# Altium PCB Terminal_Board_PCB.PcbDoc
Units mm, origin at the board's own origin, x right, y up, seen from the top; angles counter-clockwise.
Board outline 240.8 x 116.8 mm, 2 copper layers (Top Layer, Bottom Layer 1), stack 0.426 mm thick; 17 components, 37 nets, 96 pads, 40 vias.
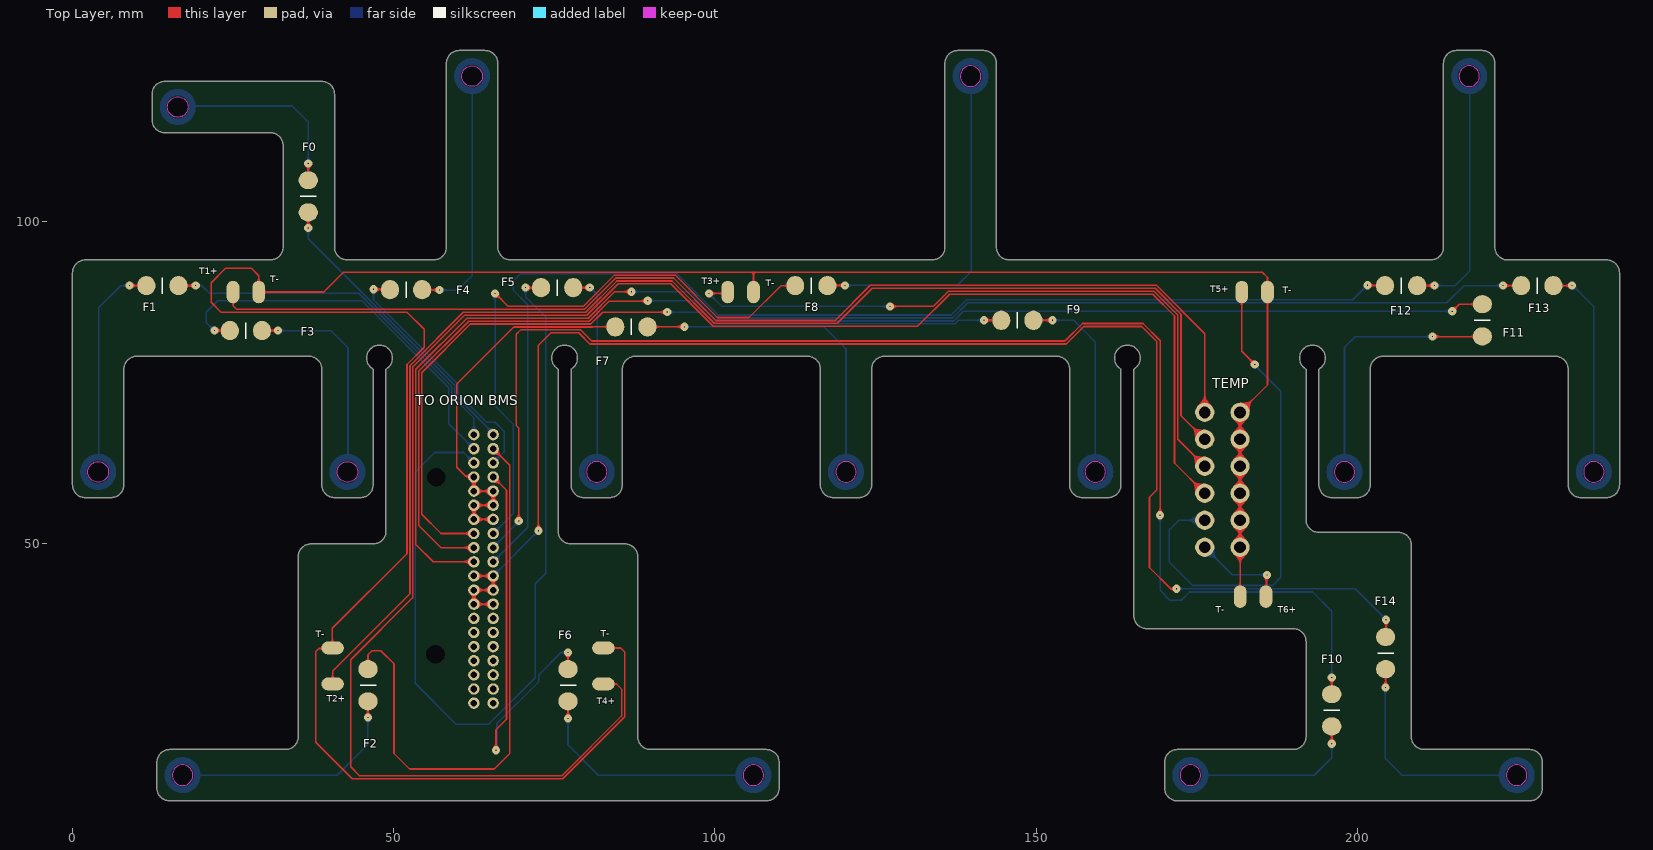
[diagram p0: Top Layer view]
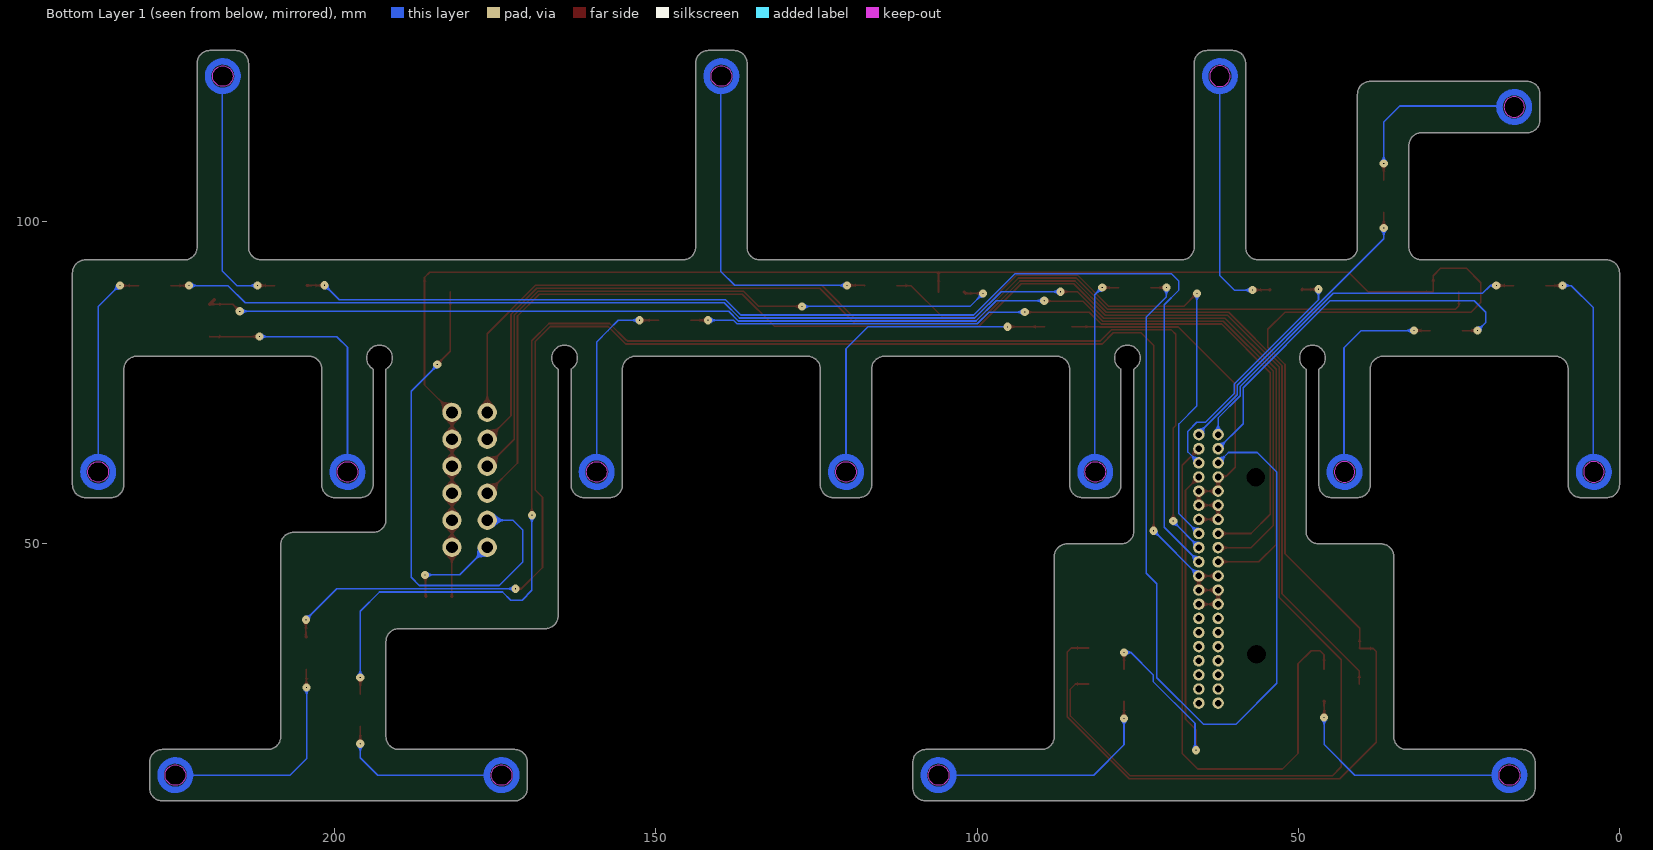
[diagram p1: Bottom Layer 1 view, seen from below]
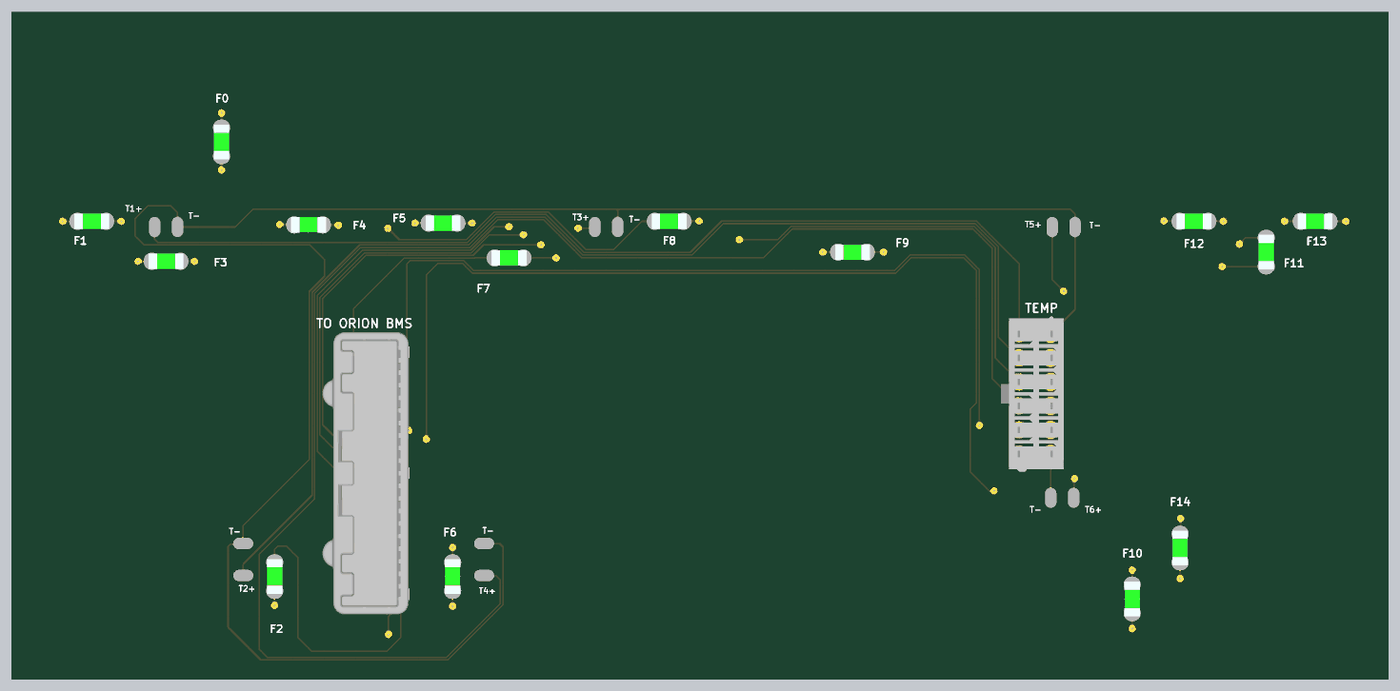
[diagram p2: 3D render of the assembled board from above, using the file's embedded part models]

## Layer stack, top to bottom
Top Solder: solder mask 0.0102, Solder Resist, Dk 3.5
Top Solder: solder mask 0.0102, Solder Resist, Dk 3.5
Stiffener 1: core 0.2032, Core-024, Dk 4.6
Top Layer: signal copper 0.035
Dielectric 1: core 0.1524, Core-020, Dk 4.1
Bottom Layer 1: signal copper 0.035
Bottom Solder: solder mask 0.0102, Solder Resist, Dk 3.5
Bottom Solder: solder mask 0.0102, Solder Resist, Dk 3.5

## Board outline
0.013,59.093 ccw(c2.013,59.093) 2.013,57.093 6.013,57.093 ccw(c6.013,59.093) 7.427,57.679 ccw(c6.013,59.093) 8.013,59.093 8.013,77.093 cw(c10.013,77.093) 10.013,79.093 36.813,79.093 cw(c36.813,77.093) 38.813,77.093 38.813,59.093 ccw(c40.813,59.093) 39.398,57.679 ccw(c40.813,59.093) 40.813,57.093 44.813,57.093 ccw(c44.813,59.093) 46.813,59.093 46.813,77.093 cw(c47.813,78.825) 48.813,77.093 48.813,64.493 48.813,51.893 cw(c46.813,51.893) 46.813,49.893 37.154,49.893 ccw(c37.154,47.893) 35.154,47.893 35.154,19.893 cw(c33.154,19.893) 34.568,18.479 cw(c33.154,19.893) 33.154,17.893 15.154,17.893 ccw(c15.154,15.893) 13.154,15.893 13.154,11.893 ccw(c15.154,11.893) 15.154,9.893 108.003,9.893 ccw(c108.003,11.893) 110.003,11.893 110.003,15.893 ccw(c108.003,15.893) 108.003,17.893 90.003,17.893 cw(c90.003,19.893) 88.003,19.893 88.003,47.893 ccw(c86.003,47.893) 86.003,49.893 77.613,49.893 cw(c77.613,51.893) 75.613,51.893 75.613,64.493 75.613,77.093 cw(c76.613,78.825) 77.613,77.093 77.613,59.093 ccw(c79.613,59.093) 79.613,57.093 83.613,57.093 ccw(c83.613,59.093) 85.027,57.679 ccw(c83.613,59.093) 85.613,59.093 85.613,77.093 cw(c87.613,77.093) 87.613,79.093 114.413,79.093 cw(c114.413,77.093) 116.413,77.093 116.413,59.093 ccw(c118.413,59.093) 116.998,57.679 ccw(c118.413,59.093) 118.413,57.093 122.413,57.093 ccw(c122.413,59.093) 124.413,59.093 124.413,77.093 cw(c126.413,77.093) 126.413,79.093 153.213,79.093 cw(c153.213,77.093) 155.213,77.093 155.213,59.093 ccw(c157.213,59.093) 157.213,57.093 161.213,57.093 ccw(c161.213,59.093) 163.213,59.093 163.213,77.093 cw(c164.213,78.825) 165.213,77.093 165.213,38.693 ccw(c167.213,38.693) 167.213,36.693 190.013,36.693 cw(c190.013,34.693) 192.013,34.693 192.013,27.293 192.013,19.893 cw(c190.013,19.893) 191.427,18.479 cw(c190.013,19.893) 190.013,17.893 172.013,17.893 ccw(c172.013,15.893) 170.013,15.893 170.013,13.893 170.013,11.893 ccw(c172.013,11.893) 170.598,10.479 ccw(c172.013,11.893) 172.013,9.893 226.803,9.893 ccw(c226.803,11.893) 228.217,10.479 ccw(c226.803,11.893) 228.803,11.893 228.803,13.893 228.803,15.893 ccw(c226.803,15.893) 226.803,17.893 210.403,17.893 cw(c210.403,19.893) 208.403,19.893 208.403,49.693 ccw(c206.403,49.693) 207.817,51.108 ccw(c206.403,49.693) 206.403,51.693 194.013,51.693 cw(c194.013,53.693) 192.013,53.693 192.013,77.093 cw(c193.013,78.825) 194.013,77.093 194.013,59.093 ccw(c196.013,59.093) 194.598,57.679 ccw(c196.013,59.093) 196.013,57.093 200.013,57.093 ccw(c200.013,59.093) 202.013,59.093 202.013,77.093 cw(c204.013,77.093) 202.813,78.693 cw(c204.013,77.093) 204.013,79.093 230.813,79.093 cw(c230.813,77.093) 232.813,77.093 232.813,59.093 ccw(c234.813,59.093) 234.813,57.093 238.813,57.093 ccw(c238.813,59.093) 240.813,59.093 240.813,92.093 ccw(c238.813,92.093) 240.227,93.508 ccw(c238.813,92.093) 238.813,94.093 223.413,94.093 cw(c223.413,96.093) 221.413,96.093 221.413,124.693 ccw(c219.412,124.693) 221.145,125.693 ccw(c219.413,124.693) 219.413,126.693 217.413,126.693 215.413,126.693 ccw(c215.413,124.693) 213.413,124.693 213.413,96.093 cw(c211.413,96.093) 211.413,94.093 178.613,94.093 145.813,94.093 cw(c145.813,96.093) 143.813,96.093 143.813,124.693 ccw(c141.813,124.693) 143.227,126.108 ccw(c141.813,124.693) 141.813,126.693 139.813,126.693 137.813,126.693 ccw(c137.813,124.693) 135.813,124.693 135.813,96.093 cw(c133.813,96.093) 133.813,94.093 101.013,94.093 68.213,94.093 cw(c68.213,96.093) 66.213,96.093 66.213,124.693 ccw(c64.213,124.693) 65.627,126.108 ccw(c64.213,124.693) 64.213,126.693 62.213,126.693 60.213,126.693 ccw(c60.213,124.693) 58.798,126.108 ccw(c60.213,124.693) 58.213,124.693 58.213,96.093 cw(c56.213,96.093) 56.213,94.093 49.508,94.093 42.803,94.093 cw(c42.803,96.093) 40.803,96.093 40.803,119.893 ccw(c38.803,119.893) 38.803,121.893 14.403,121.893 ccw(c14.403,119.893) 12.403,119.893 12.403,115.893 ccw(c14.403,115.893) 14.403,113.893 30.803,113.893 cw(c30.803,111.893) 32.803,111.893 32.803,96.093 cw(c30.803,96.093) 30.803,94.093 2.013,94.093 ccw(c2.013,92.093) 0.013,92.093
cut-out: 4.013,59.493 cw(c4.013,61.093) 2.413,61.093 cw(c4.013,61.093) 4.013,62.693 cw(c4.013,61.093) 5.613,61.093 cw(c4.013,61.093)
cut-out: 42.813,59.493 cw(c42.813,61.093) 41.213,61.093 cw(c42.813,61.093) 42.813,62.693 cw(c42.813,61.093) 44.413,61.093 cw(c42.813,61.093)
cut-out: 15.554,13.893 ccw(c17.154,13.893) 17.154,12.293 ccw(c17.154,13.893) 18.754,13.893 ccw(c17.154,13.893) 17.154,15.493 ccw(c17.154,13.893)
cut-out: 104.403,13.893 ccw(c106.003,13.893) 106.003,12.293 ccw(c106.003,13.893) 107.603,13.893 ccw(c106.003,13.893) 106.003,15.493 ccw(c106.003,13.893)
cut-out: 80.013,61.093 ccw(c81.613,61.093) 81.613,59.493 ccw(c81.613,61.093) 83.213,61.093 ccw(c81.613,61.093) 81.613,62.693 ccw(c81.613,61.093)
cut-out: 118.813,61.093 ccw(c120.413,61.093) 120.413,59.493 ccw(c120.413,61.093) 122.013,61.093 ccw(c120.413,61.093) 120.413,62.693 ccw(c120.413,61.093)
cut-out: 157.613,61.093 ccw(c159.213,61.093) 159.213,59.493 ccw(c159.213,61.093) 160.813,61.093 ccw(c159.213,61.093) 159.213,62.693 ccw(c159.213,61.093)
cut-out: 172.413,13.893 ccw(c174.013,13.893) 174.013,12.293 ccw(c174.013,13.893) 175.613,13.893 ccw(c174.013,13.893) 174.013,15.493 ccw(c174.013,13.893)
cut-out: 223.203,13.893 ccw(c224.803,13.893) 224.803,12.293 ccw(c224.803,13.893) 226.403,13.893 ccw(c224.803,13.893) 224.803,15.493 ccw(c224.803,13.893)
cut-out: 196.413,61.093 ccw(c198.013,61.093) 198.013,59.493 ccw(c198.013,61.093) 199.613,61.093 ccw(c198.013,61.093) 198.013,62.693 ccw(c198.013,61.093)
cut-out: 235.213,61.093 ccw(c236.813,61.093) 236.813,59.493 ccw(c236.813,61.093) 238.413,61.093 ccw(c236.813,61.093) 236.813,62.693 ccw(c236.813,61.093)
cut-out: 215.813,122.693 ccw(c217.413,122.693) 217.413,121.093 ccw(c217.413,122.693) 219.013,122.693 ccw(c217.413,122.693) 217.413,124.293 ccw(c217.413,122.693)
cut-out: 138.213,122.693 ccw(c139.813,122.693) 139.813,121.093 ccw(c139.813,122.693) 141.413,122.693 ccw(c139.813,122.693) 139.813,124.293 ccw(c139.813,122.693)
cut-out: 62.213,121.093 cw(c62.213,122.693) 60.613,122.693 cw(c62.213,122.693) 62.213,124.293 cw(c62.213,122.693) 63.813,122.693 cw(c62.213,122.693)
cut-out: 16.403,116.293 cw(c16.403,117.893) 14.803,117.893 cw(c16.403,117.893) 16.403,119.493 cw(c16.403,117.893) 18.003,117.893 cw(c16.403,117.893)
board region "BMS Header Stiffener": 51.813,74.155 51.813,18.783 72.613,18.783 72.613,74.155
board region "Temp Board Stiffener": 170.213,43.675 187.013,43.675 187.013,76.822 170.213,76.822
board region "Layer Stack Region 1": 826 vertices, not listed, extent 0.013,9.893 240.813,126.693

## Design rules (kind name [scope] priority, off if disabled: settings)
Clearance [All] p1: gap=0.254 ignorepadtopadclearanceinfootprint=FALSE except(0: Arc-Hole Track-Hole SMDPad-Hole THPad-Hole Via-Hole Fill-Hole Poly-Hole Region-Hole Text-Hole; 0.1: THPad-THPad; 0.152: Arc-SMDPad Track-SMDPad SMDPad-SMDPad; 0.2: Arc-THPad Track-THPad SMDPad-THPad THPad-Via; 0.203: Arc-Arc Arc-Track Arc-Region Track-Track Track-Region SMDPad-Region THPad-Region Via-Region Fill-Region Poly-Region Region-Region; 0.6: Arc-Poly Track-Poly SMDPad-Poly THPad-Poly Via-Poly Fill-Poly Poly-Poly)
DiffPairsRouting [All] p1: maxlimit=0.254 minlimit=0.254 mostfreqgap=0.254 toplayer_minwidth=0.381 toplayer_maxwidth=0.381 toplayer_prefwidth=0.381 bottomlayer_minwidth=0.381 bottomlayer_maxwidth=0.381 bottomlayer_prefwidth=0.381 substack1={0A3D3CD8-3E21-4DB5-9F74-4A8A07FAF6CB} toplayer_{0a3d3cd8-3e21-4db5-9f74-4a8a07faf6cb}_minwidth=0.381 toplayer_{0a3d3cd8-3e21-4db5-9f74-4a8a07faf6cb}_maxwidth=0.381 toplayer_{0a3d3cd8-3e21-4db5-9f74-4a8a07faf6cb}_prefwidth=0.381 bottomlayer_{0a3d3cd8-3e21-4db5-9f74-4a8a07faf6cb}_minwidth=0.381 bottomlayer_{0a3d3cd8-3e21-4db5-9f74-4a8a07faf6cb}_maxwidth=0.381 bottomlayer_{0a3d3cd8-3e21-4db5-9f74-4a8a07faf6cb}_prefwidth=0.381 maxuncoupledlength=12.7
Height [All] p1: minheight=0 maxheight=50 prefheight=12.7
HoleSize [All] p1: absolutevalues=TRUE maxlimit=10 minlimit=0.025 maxpercent=80.000 minpercent=20.000
PlaneClearance [All] p1: clearance=0.4
PlaneConnect [All] p1: pad.planeconnectstyle=Relief pad.reliefexpansion=0.508 pad.reliefentries=4 pad.reliefconductorwidth=0.8 pad.reliefairgap=0.254 via.planeconnectstyle=Direct via.reliefexpansion=0.508 via.reliefentries=4 via.reliefconductorwidth=0.8 via.reliefairgap=0.254
PolygonConnect [All] p1: thpad.connectstyle=Relief thpad.reliefconductorwidth=0.6 thpad.reliefentries=4 thpad.polygonreliefangle="90 Angle" thpad.airgapwidth=0.254 smdpad.connectstyle=Relief smdpad.reliefconductorwidth=0.6 smdpad.reliefentries=4 smdpad.polygonreliefangle="90 Angle" smdpad.airgapwidth=0.254 via.connectstyle=Direct via.reliefconductorwidth=0.6 via.reliefentries=4 via.polygonreliefangle="90 Angle" via.airgapwidth=0.254
RoutingVias [All] p1: holewidth=0.711 width=1.27 viastyle="Through Hole" minholewidth=0.203 minwidth=0.254 maxholewidth=0.711 maxwidth=1.27
SolderMaskExpansion [All] p1: expansion=0.051 istentingtop=FALSE
Width [All] p1: maxlimit=3 minlimit=0.127 preferedwidth=0.5 substack1={0A3D3CD8-3E21-4DB5-9F74-4A8A07FAF6CB}
25 further rules are at their usual default settings.

## Components (designator, comment, footprint, x,y, rotation, side; value= is the part's Value field where it differs from the comment)
F0 "0451.750MRL" FUSC6127X269N#1 36.716,103.993 r270 top
F1 "0451.750MRL" FUSC6127X269N#1 14.013,90.093 r0 top
F2 "0451.750MRL" FUSC6127X269N#1 46.013,27.893 r90 top
F3 "0451.750MRL" FUSC6127X269N#1 27.013,83.093 r180 top
F4 "0451.750MRL" FUSC6127X269N#1 51.931,89.46 r180 top
F5 "0451.750MRL" FUSC6127X269N#1 75.451,89.776 r180 top
F6 "0451.750MRL" FUSC6127X269N#2 77.144,27.893 r90 top
F7 "0451.750MRL" FUSC6127X269N#1 87.008,83.68 r180 top
F8 "0451.750MRL" FUSC6127X269N#1 115.013,90.093 r180 top
F9 "0451.750MRL" FUSC6127X269N#1 147.079,84.696 r180 top
F10 "0451.750MRL" FUSC6127X269N#1 196.013,23.99 r90 top
F11 "0451.750MRL" FUSC6127X269N#1 219.469,84.696 r90 top
F12 "0451.750MRL" FUSC6127X269N#1 206.813,90.093 r180 top
F13 "0451.750MRL" FUSC6127X269N#1 228.013,90.093 r180 top
F14 "0451.750MRL" FUSC6127X269N#1 204.403,32.893 r90 top
TEMP "39293126" 39293126 181.75,70.372 r90 top
"TO ORION BMS" "1376113-6" 1376113-6 62.497,44.904 r270 top

## Footprints (in the part's own frame and the unit in brackets; to place one, negate y for a bottom-side part, rotate by r counter-clockwise, add the part's x,y. Pads: shape width x height; smd on the part's side, far side on the other; paste and mask are expansions set on the pad)
1376113-6 [mil]
  round 0 hole 114.49 unplated: 0(-605,-230) 0(480,-235)
  round 70 hole 40: 1(-866.14,118.11) 2(-866.14,0) 3(-779.53,118.11) 4(-779.53,0) 5(-692.91,118.11) 6(-692.91,0) 7(-606.3,118.11) 8(-606.3,0) 9(-519.69,118.11) 10(-519.69,0) 11(-433.07,118.11) 12(-433.07,0) 13(-346.46,118.11) 14(-346.46,0) 15(-259.84,118.11) 16(-259.84,0) 17(-173.23,118.11) 18(-173.23,0) 19(-86.61,118.11) 20(-86.61,0) 21(0,118.11) 22(0,0) 23(86.61,118.11) 24(86.61,0) 25(173.23,118.11) 26(173.23,0) 27(259.84,118.11) 28(259.84,0) 29(346.46,118.11) 30(346.46,0) 31(433.07,118.11) 32(433.07,0) 33(519.68,118.11) 34(519.68,0) 35(606.3,118.11) 36(606.3,0) 37(692.91,118.11) 38(692.91,0) 39(779.53,118.11) 40(779.53,0)
  body extent -1015,-321 930,281, height 940
39293126 [mm]
  round 3 hole 1.85: 1(0,0) 2(0,5.5) 3(-4.2,0) 4(-4.2,5.5) 5(-8.4,0) 6(-8.4,5.5) 7(-12.6,0) 8(-12.6,5.5) 9(-16.8,0) 10(-16.8,5.5) 11(-21,0) 12(-21,5.5)
  body extent -24.1,-2.3 3.1,8.7, height 2.99
FUSC6127X269N#1 [mm]
  rrect100% 2.8x3 smd: 1(-2.5,0) 2(2.5,0)
  silkscreen extent 0,-1.24 0,1.24, body extent -3.05,-1.35 3.05,1.35, height 2.69
FUSC6127X269N#2 [mm]
  rrect100% 2.8x3 smd paste+0: 1(-2.5,0)
  rrect100% 2.8x3 smd: 2(2.5,0)
  silkscreen extent 0,-1.24 0,1.24, body extent -3.05,-1.35 3.05,1.35, height 2.69

## Part data
F0 F1 F2 F3 F4 F5 F6 F7 F8 F9 F10 F11 F12 F13 F14: "Fuse", Manufacturer_Name=LITTELFUSE, Arrow Part Number=0451.750MRL, Arrow Price/Stock=https://www.arrow.com/en/products/0451.750mrl/littelfuse, Datasheet Link=http://www.farnell.com/datasheets/88908.pdf, Height=2.69mm, Manufacturer_Part_Number=0451.750MRL
TEMP: Digikey Part Number=WM3848-ND, Angle=0, Contact=Tin, Flange=No, Part Number=39293126, Pitch=4.2mm, Positions=12, Row Spacing=5.5mm
"TO ORION BMS": Digikey Part Number=1376113-6-ND, Angle=180, Contact=Gold, Digikey Link=https://www.digikey.com.au/products/en?keywords=1376113-6, Flange=na, Part Number=1376113-6, Pitch=3, Positions=40, Row Spacing=2.2

## Free pads (board coordinates)
  oval 2x3.5 smd: 2(25.013,89.093) 2(29.013,89.093) 2(102.013,89.093) 2(106.013,89.093) 2(181.769,41.693) 2(182.013,89.093) 2(185.769,41.693) 2(186.013,89.093)
  oval 3.5x2 smd: 2(40.513,28.093) 2(40.513,33.693) 2(82.644,28.093) 2(82.644,33.693)

## Via types
v1: diameter 1.27, hole 0, Top Layer to Bottom Layer 1, 40 vias

## Nets (pads, with @x,y where several pads share a name; then routed paths per layer and width w, separated by ;. In a path a pad name is that pad's centre, name@x,y a point inside that pad or via, vN(x,y) a via of type N, cw(c..) or ccw(c..) an arc to the next point about the centre after c; other vN are vias at no path point)
Tap0: "TO ORION BMS.1" F0.2 | length 46.5
  Top Layer w0.254: v1(36.716,99.047) F0.2
  Bottom Layer 1 w0.254: v1(36.716,99.047) 36.716,97.385 59.51,74.59 59.51,73.118 65.497,67.131 65.497,66.904
Tap1: "TO ORION BMS.2" F1.2 | length 58
  Top Layer w0.254: F1.2 v1(19.19,90.093)
  Bottom Layer 1 w0.254: v1(19.19,90.093) 20.143,90.093 21.349,88.887 44.567,88.887 59.053,74.401 59.053,72.929 62.497,69.485 62.497,66.904
Tap2: "TO ORION BMS.3" F2.2 | length 89.9
  Top Layer w0.254: F2.2 46.013,32.652 46.622,33.261 48.019,33.261 50.051,31.229 50.051,17.281 52.485,14.846 65.672,14.846 68.085,17.259 68.085,62.116 65.497,64.704
Tap3: "TO ORION BMS.4" F3.2 | length 61
  Top Layer w0.254: v1(22.111,83.093) F3.2
  Bottom Layer 1 w0.254: v1(22.111,83.093) 20.841,84.363 20.841,85.966 22.619,87.744 45.063,87.744 58.596,74.212 58.596,68.605 62.497,64.704
Tap4: "TO ORION BMS.5" F4.2 | length 39.5
  Top Layer w0.254: v1(46.876,89.524) 46.908,89.492 49.335,89.492 F4.2@49.367,89.524
  Top Layer w0.5: F4.2@49.367,89.524 F4.2
  Bottom Layer 1 w0.254: v1(46.876,89.524) 46.876,87.871 59.967,74.78 59.967,73.313 64.459,68.821 65.799,68.821 67.196,67.424 67.196,64.203 65.497,62.504
Tap5: "TO ORION BMS.6" F5.2 | length 133.6
  Top Layer w0.254: v1(70.538,89.776) F5.2
  Bottom Layer 1 w0.254: 62.497,62.504 60.879,64.122 56.401,64.122 53.353,61.074 53.353,28.181 59.703,21.831 64.783,21.831 72.022,29.07 72.022,43.675 73.673,45.326 73.673,85.204 70.538,88.339 v1@70.538,90.03
Tap6: "TO ORION BMS.7" F6.2 | length 67.2
  Top Layer w0.254: 65.497,60.304 67.577,58.224 67.577,22.593 65.926,20.942 v1(65.926,17.767) ; F6.2 v1(77.144,33.007)
  Bottom Layer 1 w0.254: v1(65.926,17.767) 66.1,17.942 66.1,21.964 72.613,28.476 72.613,29.546 76.074,33.007 v1(77.144,33.007)
Tap7: "TO ORION BMS.8" "TO ORION BMS.9" "TO ORION BMS.10" "TO ORION BMS.11" "TO ORION BMS.12" "TO ORION BMS.13" "TO ORION BMS.14" F7.2 | length 61
  Top Layer w0.254: 65.497,53.704 62.497,53.704 62.497,55.904 65.497,55.904 65.497,58.104 62.497,58.104 62.497,60.304 62.362,60.439 61.227,60.439 59.83,61.836 59.83,74.79 68.694,83.655 80.894,83.655 80.92,83.68 F7.2@85.247,83.68
Tap8: "TO ORION BMS.15" F8.2 | length 94.2
  Top Layer w0.254: v1(65.799,88.887) 67.831,86.855 79.515,86.855 84.391,91.732 93.815,91.732 100.419,85.128 105.321,85.128 110.286,90.093 F8.2
  Bottom Layer 1 w0.254: 65.497,51.504 68.593,54.6 68.593,68.567 65.799,71.361 v1(65.799,88.887)
Tap9: "TO ORION BMS.16" F9.2 | length 126.5
  Top Layer w0.254: 62.497,51.504 57.376,51.504 54.369,54.511 54.369,76.533 61.948,84.112 80.705,84.112 82.559,85.966 v1(92.596,85.966) ; v1(141.872,84.696) F9.2
  Bottom Layer 1 w0.254: v1(92.596,85.966) 98.149,85.966 99.978,84.138 137.376,84.138 137.935,84.696 v1(141.872,84.696)
Tap10: "TO ORION BMS.17" F10.2 | length 219.4
  Top Layer w0.254: v1(69.482,53.454) 69.482,67.943 69.101,68.324 69.101,82.537 69.761,83.198 79.108,83.198 80.835,81.471 154.432,81.471 154.545,81.584 154.623,81.584 157.227,84.188 166.648,84.188 169.304,81.533 v1(169.304,54.343) ; F10.2 v1(196.013,29.07)
  Bottom Layer 1 w0.254: 65.497,49.304 65.497,49.387 69.482,53.372 v1(69.482,53.454) ; v1(169.304,54.343) 169.304,42.659 170.828,41.135 172.606,41.135 173.876,42.405 193.035,42.405 196.013,39.428 v1(196.013,29.07)
Tap11: "TO ORION BMS.18" F11.2 | length 207.5
  Top Layer w0.254: 62.497,49.304 57.376,49.304 53.911,52.769 53.911,76.794 61.687,84.569 80.462,84.569 83.577,87.685 89.488,87.685 v1(89.548,87.744) ; v1(214.77,86.093) 215.873,87.196 F11.2
  Top Layer w0.5: F11.2@218.746,87.901 219.451,87.196 F11.2
  Bottom Layer 1 w0.254: v1(89.548,87.744) 97.018,87.744 100.167,84.595 137.187,84.595 138.685,86.093 v1(214.77,86.093)
Tap12: "TO ORION BMS.19" F12.2 | length 187.7
  Top Layer w0.254: v1@201.594,90.125 F12.2@204.281,90.125
  Top Layer w0.5: v1(201.562,90.157) v1@201.594,90.125 ; F12.2@204.281,90.125 F12.2
  Bottom Layer 1 w0.254: 65.497,47.104 70.879,52.486 70.879,87.109 68.593,89.395 68.593,90.792 69.736,91.935 94.12,91.935 100.546,85.509 136.808,85.509 139.17,87.871 199.276,87.871 v1(201.562,90.157)
Tap13: "TO ORION BMS.20" F13.2 | length 218.3
  Top Layer w0.254: 62.497,47.104 56.147,47.104 53.454,49.797 53.454,77.055 61.425,85.027 80.272,85.027 84.387,89.141 v1(87.008,89.141) ; v1(222.651,90.093) F13.2
  Bottom Layer 1 w0.254: v1(87.008,89.141) 96.267,89.141 100.357,85.052 136.997,85.052 139.359,87.414 213.931,87.414 216.611,90.093 v1(222.651,90.093)
Tap14: "TO ORION BMS.21" "TO ORION BMS.22" "TO ORION BMS.23" "TO ORION BMS.24" "TO ORION BMS.25" "TO ORION BMS.26" F14.2 | length 230.6
  Top Layer w0.254: 62.497,44.904 65.497,44.904 65.497,42.704 62.497,42.704 62.497,40.504 65.497,40.504 ; v1(72.53,51.937) 72.53,80.759 74.511,82.741 78.804,82.741 80.531,81.013 154.699,81.013 157.416,83.731 166.459,83.731 168.796,81.394 168.796,58.28 167.653,57.137 167.653,46.215 170.955,42.913 v1(171.844,42.913) ; F14.2@204.483,35.473 v1(204.483,38.087)
  Top Layer w0.5: F14.2 F14.2@204.483,35.473
  Bottom Layer 1 w0.254: 65.497,44.904 v1(72.53,51.937) ; v1(171.844,42.913) 199.657,42.913 v1(204.483,38.087)
TEMP1+: pad.2@25.013,89.093 TEMP.2 | length 176
  Top Layer w0.254: pad.2@25.013,89.093 25.013,86.962 25.551,86.424 52.615,86.424 52.64,86.398 79.704,86.398 84.581,91.275 93.554,91.275 100.158,84.671 118.732,84.671 124.193,90.132 168.729,90.132 176.25,82.611 TEMP.2
TEMP2+: pad.2@40.513,28.093 TEMP.4 | length 207.7
  Top Layer w0.254: pad.2@40.513,28.093 40.513,30.093 52.54,42.121 52.54,77.628 60.853,85.941 79.893,85.941 84.77,90.818 93.321,90.818 99.925,84.214 119.037,84.214 124.498,89.675 168.539,89.675 172.564,85.65 172.564,69.858 TEMP.4
TEMP3+: pad.2@102.013,89.093 TEMP.6 | length 104.6
  Top Layer w0.254: v1(99.073,88.887) pad.2@101.807,88.887 ; v1(127.267,86.855) 134.009,86.855 136.371,89.218 168.35,89.218 172.056,85.512 172.056,66.166 TEMP.6
  Top Layer w0.5: pad.2@101.807,88.887 pad.2@102.013,89.093
  Bottom Layer 1 w0.254: v1(99.073,88.887) 101.105,86.855 v1(127.267,86.855)
TEMP4+: pad.2@82.644,28.093 TEMP.8 | length 279.9
  Top Layer w0.254: pad.2@82.644,28.093 84.683,28.093 85.484,27.292 85.484,23.113 76.15,13.78 44.744,13.78 43.32,15.204 43.32,31.877 52.997,41.554 52.997,77.439 61.042,85.484 80.083,85.484 84.96,90.361 93.131,90.361 99.735,83.757 131.557,83.757 136.561,88.76 168.161,88.76 171.548,85.373 171.548,62.474 TEMP.8
TEMP5+: pad.2@182.013,89.093 TEMP.10 | length 77.5
  Top Layer w0.254: pad.2@182.013,89.093 182.013,79.861 v1(184.036,77.838)
  Bottom Layer 1 w0.254: TEMP.10 172.259,53.572 170.701,52.014 170.701,47.104 174.384,43.421 186.83,43.421 188.1,44.691 188.1,73.647 184.036,77.711 v1(184.036,77.838)
TEMP6+: pad.2@185.769,41.693 TEMP.12 | length 14.9
  Top Layer w0.254: pad.2@185.855,41.779 v1@185.855,44.986
  Top Layer w0.5: pad.2@185.769,41.693 pad.2@185.855,41.779 ; v1@185.855,44.986 v1(185.941,45.072)
  Bottom Layer 1 w0.254: TEMP.12 180.55,45.072 v1(185.941,45.072)
TEMPGND: pad.2@29.013,89.093 pad.2@40.513,33.693 pad.2@82.644,33.693 pad.2@106.013,89.093 pad.2@181.769,41.693 pad.2@186.013,89.093 TEMP.1 TEMP.3 TEMP.5 TEMP.7 TEMP.9 TEMP.11 | length 403.2
  Top Layer w0.254: pad.2@40.468,33.648 40.468,36.759 52.083,48.374 52.083,77.817 54.75,80.484 54.75,83.299 52.083,85.966 23.127,85.966 21.603,87.49 21.603,90.538 23.889,92.824 27.826,92.824 29.013,91.637 29.013,89.093 39.101,89.093 42.197,92.189 106.013,92.189 ; pad.2@40.513,33.693 40.422,33.603 38.327,33.603 37.859,33.134 37.859,19.037 43.574,13.322 76.34,13.322 85.992,22.974 85.992,33.058 85.357,33.693 pad.2@82.644,33.693 ; pad.2@106.013,89.093 106.013,92.189 ; TEMP.11 TEMP.9 TEMP.7 TEMP.5 TEMP.3 TEMP.1 186.013,74.635 186.013,91.355 185.179,92.189 106.013,92.189 ; pad.2@181.759,41.703 TEMP.11@181.759,49.363
  Top Layer w0.5: TEMP.11 TEMP.11@181.759,49.363 ; pad.2@181.759,41.703 pad.2@181.769,41.693
ToBusbar0: F0.1 | length 42.3
  Top Layer w0.254: F0.1 v1(36.716,109.08)
  Bottom Layer 1 w0.254: 18.936,118.051 34.222,118.051 36.716,115.557 v1(36.716,109.08)
  Bottom Layer 1 w1: 18.703,117.893 ccw(c16.403,117.893) 18.703,117.893
ToBusbar1: F1.1 | length 46.4
  Top Layer w0.254: v1(8.903,90.093) F1.1
  Bottom Layer 1 w0.254: 4.091,63.614 4.091,86.679 7.506,90.093 v1(8.903,90.093)
  Bottom Layer 1 w1: 6.313,61.093 ccw(c4.013,61.093) 6.313,61.093
ToBusbar2: F2.1 | length 49.7
  Top Layer w0.254: v1(45.987,22.847) F2.1@45.987,25.367
  Top Layer w0.5: F2.1@45.987,25.367 F2.1
  Bottom Layer 1 w0.254: 19.454,13.893 41.224,13.893 45.987,18.656 v1(45.987,22.847)
  Bottom Layer 1 w1: 19.454,13.893 ccw(c17.154,13.893) 19.454,13.893
ToBusbar3: F3.1 | length 45.7
  Top Layer w0.254: F3.1 v1(32.017,83.093)
  Bottom Layer 1 w0.254: v1(32.017,83.093) 40.224,83.093 42.891,80.426 42.891,63.614
  Bottom Layer 1 w1: 45.113,61.093 ccw(c42.813,61.093) 45.113,61.093
ToBusbar4: F4.1 | length 51.7
  Top Layer w0.254: F4.1@54.494,89.397 54.525,89.429 57.124,89.429 v1(57.155,89.397)
  Top Layer w0.5: F4.1 F4.1@54.494,89.397
  Bottom Layer 1 w0.254: v1(57.155,89.397) 59.959,89.397 62.213,91.651 62.213,120.129
  Bottom Layer 1 w1: 64.513,122.693 ccw(c62.213,122.693) 64.513,122.693
ToBusbar5: F5.1 | length 43.8
  Top Layer w0.254: F5.1 v1(80.531,89.776)
  Bottom Layer 1 w0.254: v1(80.531,89.776) 80.571,89.776 81.691,88.656 81.691,63.487
  Bottom Layer 1 w1: 83.913,61.093 ccw(c81.613,61.093) 83.913,61.093
ToBusbar6: F6.1 | length 49.4
  Top Layer w0.254: v1(77.144,22.72) F6.1
  Bottom Layer 1 w0.254: v1(77.144,22.72) 77.144,18.614 81.865,13.893 103.391,13.893
  Bottom Layer 1 w1: 108.303,13.893 ccw(c106.003,13.893) 108.303,13.893
ToBusbar7: F7.1 | length 63.4
  Top Layer w0.254: F7.1 v1(95.263,83.68)
  Bottom Layer 1 w0.254: v1(95.263,83.68) 116.98,83.68 120.413,80.247 120.413,63.614
  Bottom Layer 1 w1: 122.713,61.093 ccw(c120.413,61.093) 122.713,61.093
ToBusbar8: F8.1 | length 65.6
  Top Layer w0.254: F8.1 117.551,90.132 v1(120.282,90.132)
  Bottom Layer 1 w0.254: v1(120.282,90.132) 137.748,90.132 139.891,92.276 139.891,120.129
  Bottom Layer 1 w1: 142.113,122.693 ccw(c139.813,122.693) 142.113,122.693
ToBusbar9: F9.1 | length 43.2
  Top Layer w0.254: F9.1 v1(152.54,84.696)
  Bottom Layer 1 w0.254: v1(152.54,84.696) 155.842,84.696 157.445,83.093 159.213,81.325 159.213,63.614
  Bottom Layer 1 w1: 161.513,61.093 ccw(c159.213,61.093) 161.513,61.093
ToBusbar10: F10.1 | length 40.1
  Top Layer w0.254: v1(196.013,18.788) F10.1
  Bottom Layer 1 w0.254: 176.313,13.893 193.282,13.893 196.013,16.624 v1(196.013,18.788)
  Bottom Layer 1 w1: 176.313,13.893 ccw(c174.013,13.893) 176.313,13.893
ToBusbar11: F11.1 | length 53.5
  Top Layer w0.254: v1(211.722,82.156) 219.429,82.156 F11.1
  Bottom Layer 1 w0.254: 198.013,63.614 198.013,80.512 199.657,82.156 v1(211.722,82.156)
  Bottom Layer 1 w1: 200.313,61.093 ccw(c198.013,61.093) 200.313,61.093
ToBusbar12: F12.1 | length 51.3
  Top Layer w0.254: F12.1 v1(211.993,90.093)
  Bottom Layer 1 w0.254: v1(211.993,90.093) 215.214,90.093 217.491,92.371 217.491,120.129
  Bottom Layer 1 w1: 219.713,122.693 ccw(c217.413,122.693) 219.713,122.693
ToBusbar13: F13.1 | length 45.2
  Top Layer w0.254: F13.1 v1(233.439,90.093)
  Bottom Layer 1 w0.254: v1(233.439,90.093) 233.566,90.093 236.813,86.846 236.813,63.741
  Bottom Layer 1 w1: 239.113,61.093 ccw(c236.813,61.093) 239.113,61.093
ToBusbar14: F14.1 | length 47.4
  Top Layer w0.254: v1(204.403,27.546) F14.1
  Bottom Layer 1 w0.254: v1(204.403,27.546) 204.356,27.499 204.356,16.497 206.96,13.893 222.263,13.893
  Bottom Layer 1 w1: 227.103,13.893 ccw(c224.803,13.893) 227.103,13.893
pads on no net: "TO ORION BMS.0" "TO ORION BMS.27" "TO ORION BMS.28" "TO ORION BMS.29" "TO ORION BMS.30" "TO ORION BMS.31" "TO ORION BMS.32" "TO ORION BMS.33" "TO ORION BMS.34" "TO ORION BMS.35" "TO ORION BMS.36" "TO ORION BMS.37" "TO ORION BMS.38" "TO ORION BMS.39" "TO ORION BMS.40"

## Silkscreen, mask and mechanical layers (free items; w line width, h text height)
Top Overlay:
  text "T1+" at 19.751,91.861 h1
  text "T-" at 30.8,90.591 h1
  text "T3+" at 97.983,90.337 h1
  text "T-" at 107.889,89.956 h1
  text "T5+" at 177.104,89.067 h1
  text "T-" at 188.407,88.94 h1
  text "T-" at 177.993,39.156 h1
  text "T6+" at 187.645,39.156 h1
  text "T-" at 82.235,35.473 h1
  text "T-" at 37.912,35.346 h1
  text "T2+" at 39.563,25.313 h1
  text "T4+" at 81.6,24.932 h1
Mechanical 1:
  circle w0.013: c224.803,13.893 r1.6
  circle w0.013: c174.013,13.893 r1.6
  circle w0.013: c106.003,13.893 r1.6
  circle w0.013: c17.154,13.893 r1.6
  circle w0.013: c217.413,122.693 r1.6
  circle w0.013: c139.813,122.693 r1.6
  circle w0.013: c16.403,117.893 r1.6
  circle w0.013: c62.213,122.693 r1.6
  circle w0.013: c236.813,61.093 r1.6
  circle w0.013: c198.013,61.093 r1.6
  circle w0.013: c159.213,61.093 r1.6
  circle w0.013: c120.413,61.093 r1.6
  circle w0.013: c81.613,61.093 r1.6
  circle w0.013: c42.813,61.093 r1.6
  circle w0.013: c4.013,61.093 r1.6
  lines w0.013: 0.013,59.093 ccw(c2.013,59.093) 2.013,57.093 6.013,57.093 ccw(c6.013,59.093) 8.013,59.093 8.013,77.093 cw(c10.013,77.093) 10.013,79.093 36.813,79.093 cw(c36.813,77.093) 38.813,77.093 38.813,59.093 ccw(c40.813,59.093) 40.813,57.093 44.813,57.093 ccw(c44.813,59.093) 46.813,59.093 46.813,77.093 cw(c47.813,78.825) 48.813,77.093 48.813,51.893 cw(c46.813,51.893) 46.813,49.893 37.154,49.893 ccw(c37.154,47.893) 35.154,47.893 35.154,19.893 cw(c33.154,19.893) 33.154,17.893 15.154,17.893 ccw(c15.154,15.893) 13.154,15.893 13.154,11.893 ccw(c15.154,11.893) 15.154,9.893 108.003,9.893 ccw(c108.003,11.893) 110.003,11.893 110.003,15.893 ccw(c108.003,15.893) 108.003,17.893 90.003,17.893 cw(c90.003,19.893) 88.003,19.893 88.003,47.893 ccw(c86.003,47.893) 86.003,49.893 77.613,49.893 cw(c77.613,51.893) 75.613,51.893 75.613,77.093 cw(c76.613,78.825) 77.613,77.093 77.613,59.093 ccw(c79.613,59.093) 79.613,57.093 83.613,57.093 ccw(c83.613,59.093) 85.613,59.093 85.613,77.093 cw(c87.613,77.093) 87.613,79.093 114.413,79.093 cw(c114.413,77.093) 116.413,77.093 116.413,59.093 ccw(c118.413,59.093) 118.413,57.093 122.413,57.093 ccw(c122.413,59.093) 124.413,59.093 124.413,77.093 cw(c126.413,77.093) 126.413,79.093 153.213,79.093 cw(c153.213,77.093) 155.213,77.093 155.213,59.093 ccw(c157.213,59.093) 157.213,57.093 161.213,57.093 ccw(c161.213,59.093) 163.213,59.093 163.213,77.093 cw(c164.213,78.825) 165.213,77.093 165.213,38.693 ccw(c167.213,38.693) 167.213,36.693 190.013,36.693 cw(c190.013,34.693) 192.013,34.693 192.013,19.893 cw(c190.013,19.893) 190.013,17.893 172.013,17.893 ccw(c172.013,15.893) 170.013,15.893 170.013,11.893 ccw(c172.013,11.893) 172.013,9.893 226.803,9.893 ccw(c226.803,11.893) 228.803,11.893 228.803,15.893 ccw(c226.803,15.893) 226.803,17.893 210.403,17.893 cw(c210.403,19.893) 208.403,19.893 208.403,49.693 ccw(c206.403,49.693) 206.403,51.693 194.013,51.693 cw(c194.013,53.693) 192.013,53.693 192.013,77.093 cw(c193.013,78.825) 194.013,77.093 194.013,59.093 ccw(c196.013,59.093) 196.013,57.093 200.013,57.093 ccw(c200.013,59.093) 202.013,59.093 202.013,77.093 cw(c204.013,77.093) 204.013,79.093 230.813,79.093 cw(c230.813,77.093) 232.813,77.093 232.813,59.093 ccw(c234.813,59.093) 234.813,57.093 238.813,57.093 ccw(c238.813,59.093) 240.813,59.093 240.813,92.093 ccw(c238.813,92.093) 238.813,94.093 223.413,94.093 cw(c223.413,96.093) 221.413,96.093 221.413,124.693 ccw(c219.413,124.693) 219.413,126.693 215.413,126.693 ccw(c215.413,124.693) 213.413,124.693 213.413,96.093 cw(c211.413,96.093) 211.413,94.093 145.813,94.093 cw(c145.813,96.093) 143.813,96.093 143.813,124.693 ccw(c141.813,124.693) 141.813,126.693 137.813,126.693 ccw(c137.813,124.693) 135.813,124.693 135.813,96.093 cw(c133.813,96.093) 133.813,94.093 68.213,94.093 cw(c68.213,96.093) 66.213,96.093 66.213,124.693 ccw(c64.213,124.693) 64.213,126.693 60.213,126.693 ccw(c60.213,124.693) 58.213,124.693 58.213,96.093 cw(c56.213,96.093) 56.213,94.093 42.803,94.093 cw(c42.803,96.093) 40.803,96.093 40.803,119.893 ccw(c38.803,119.893) 38.803,121.893 14.403,121.893 ccw(c14.403,119.893) 12.403,119.893 12.403,115.893 ccw(c14.403,115.893) 14.403,113.893 30.803,113.893 cw(c30.803,111.893) 32.803,111.893 32.803,96.093 cw(c30.803,96.093) 30.803,94.093 2.013,94.093 ccw(c2.013,92.093) 0.013,92.093 0.013,59.093